# Altium PCB HolderDog_Simetric.PcbDoc
Units mm, origin at the board's own origin, x right, y up, seen from the top; angles counter-clockwise.
Board outline 356.65 x 138 mm, 2 copper layers (Top Layer, Bottom Layer); 20 components, 16 nets, 106 pads, 29 vias.
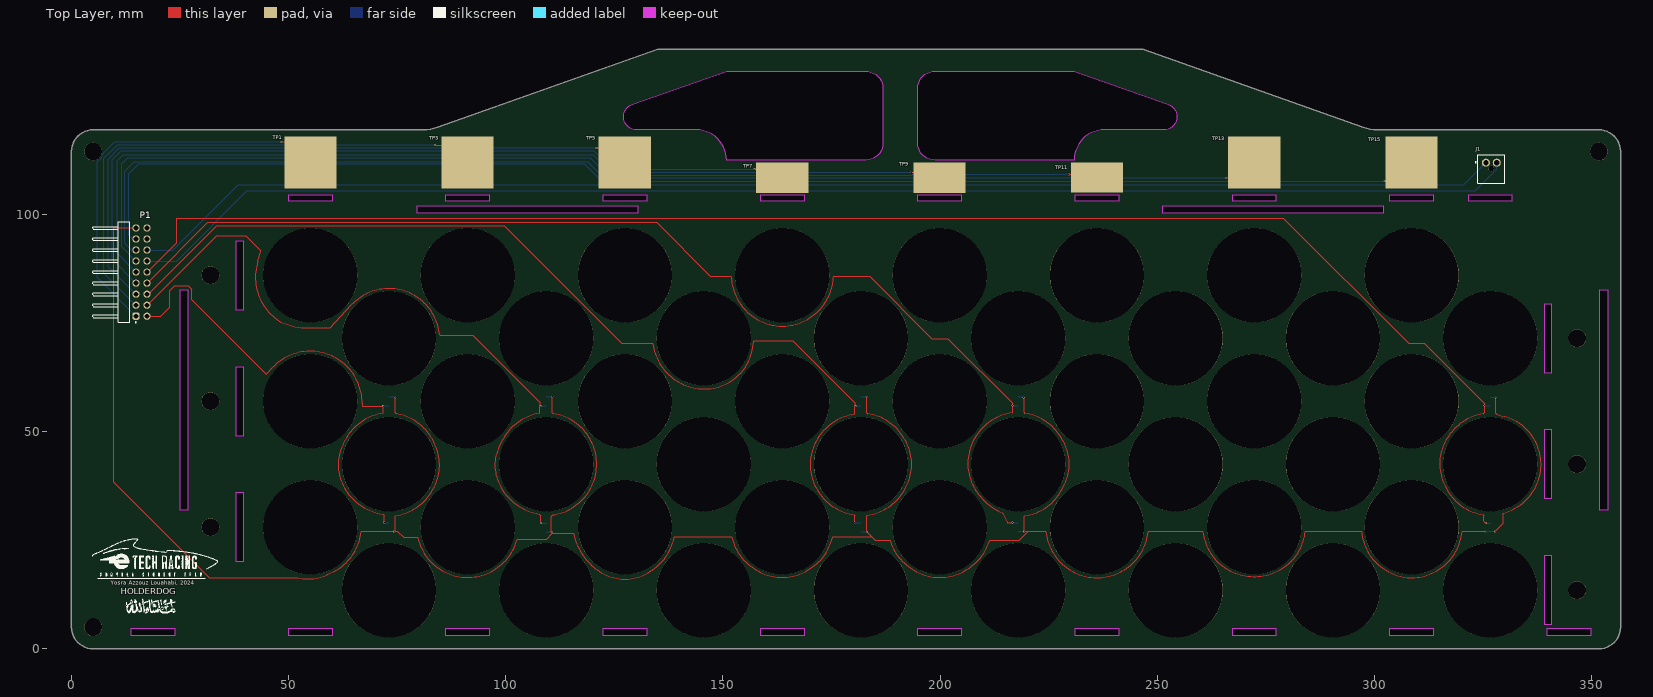
[diagram p0: Top Layer view]
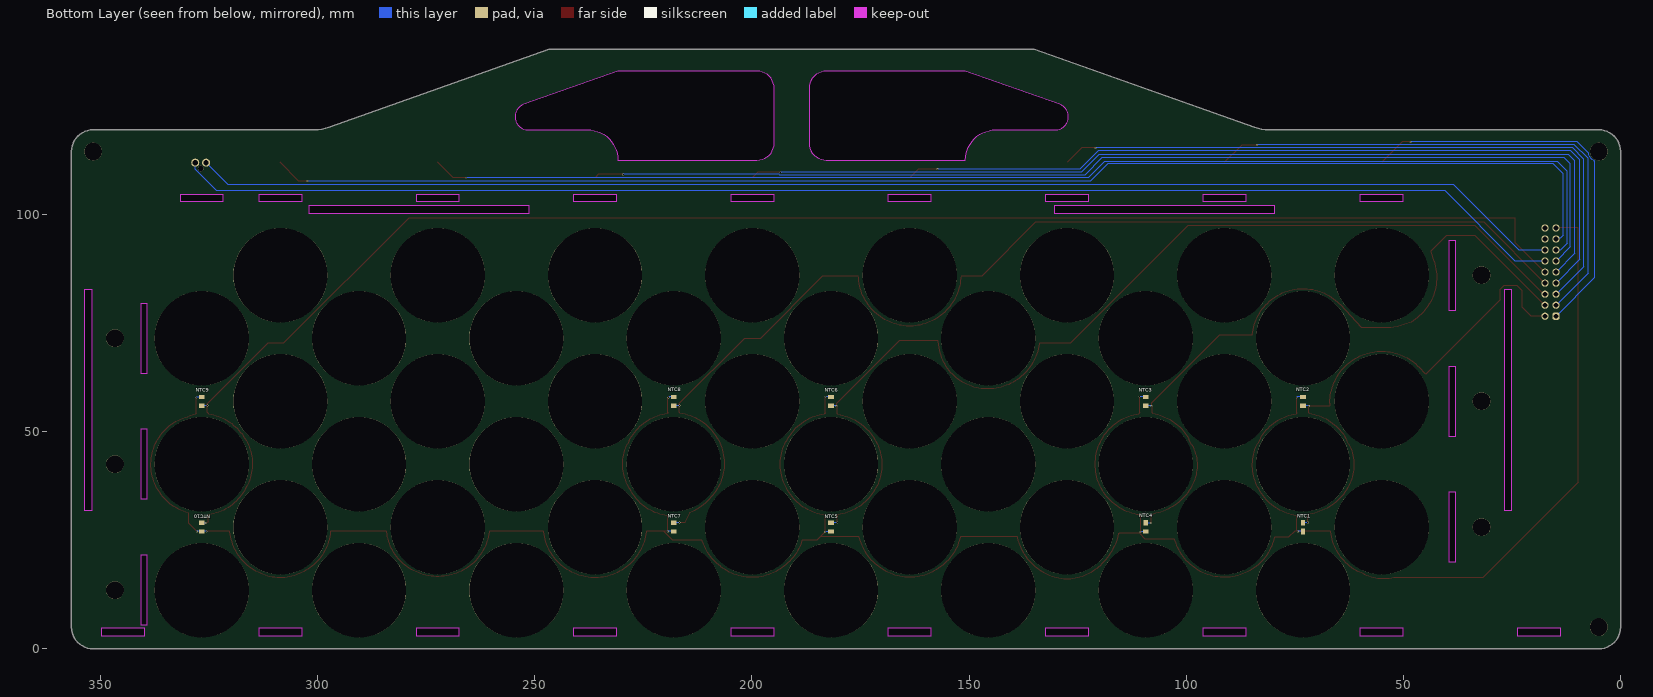
[diagram p1: Bottom Layer view, seen from below]
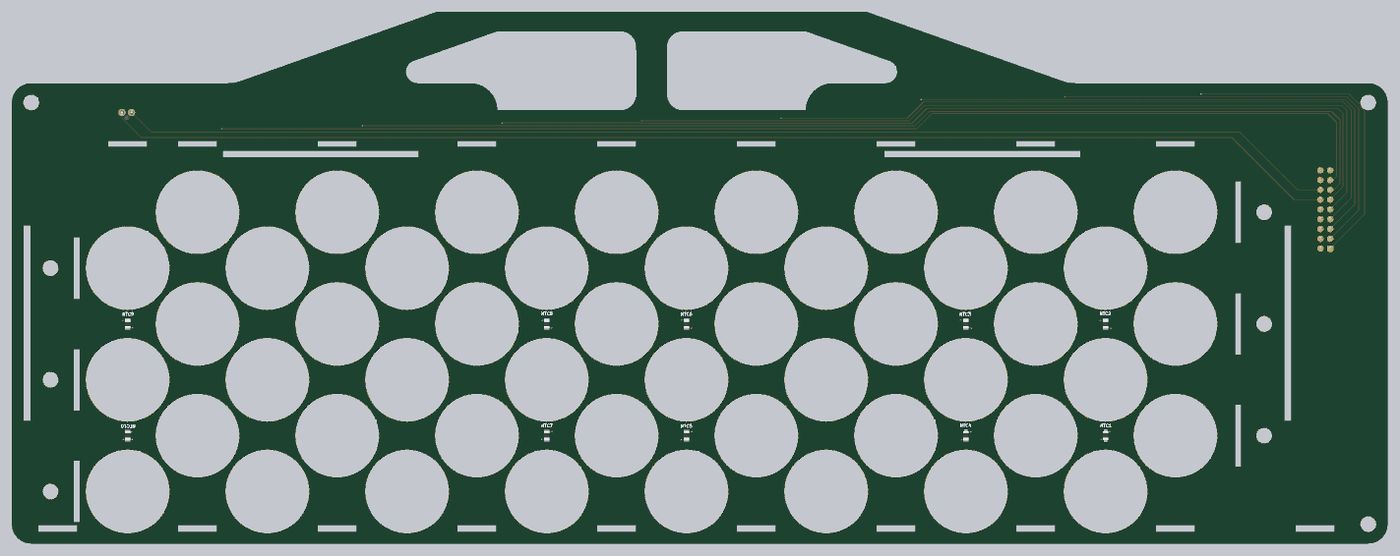
[diagram p2: 3D render of the assembled board from below, using the file's embedded part models]

## Layer stack, top to bottom
Top Solder: solder mask 0.0102, Solder Resist, Dk 3.5
Top Layer: signal copper 0.0356
Dielectric 1: dielectric 0.32, FR-4, Dk 4.8
Bottom Layer: signal copper 0.0356
Bottom Solder: solder mask 0.0102, Solder Resist, Dk 3.5

## Board outline
134.977,138 84.31,120.073 83.497,119.824 82.666,119.644 81.823,119.536 80.974,119.5 5,119.5 4.347,119.457 3.706,119.33 3.087,119.119 2.5,118.83 1.956,118.467 1.464,118.036 1.033,117.544 0.67,117 0.381,116.413 0.17,115.794 0.043,115.153 0,114.5 0,5 0.043,4.347 0.17,3.706 0.381,3.087 0.67,2.5 1.033,1.956 1.464,1.464 1.956,1.033 2.5,0.67 3.087,0.381 3.706,0.17 4.347,0.043 5,0 351.65,0 352.303,0.043 352.945,0.17 353.564,0.381 354.15,0.67 354.694,1.033 355.186,1.464 355.617,1.956 355.981,2.5 356.27,3.087 356.48,3.706 356.608,4.347 356.65,5 356.65,114.5 356.608,115.153 356.48,115.794 356.27,116.413 355.981,117 355.617,117.544 355.186,118.036 354.694,118.467 354.15,118.83 353.564,119.119 352.945,119.33 352.303,119.457 351.65,119.5 300.676,119.5 299.827,119.536 298.984,119.644 298.153,119.824 297.341,120.073 246.673,138
cut-out: 50,4.75 60,4.75 60,3 50,3
cut-out: 303.54,3 303.54,4.75 313.54,4.75 313.54,3
cut-out: 340.65,5.5 339.15,5.5 339.15,21.5 340.65,21.5
cut-out: 39.5,20 38,20 38,36 39.5,36
cut-out: 340.65,34.5 339.15,34.5 339.15,50.5 340.65,50.5
cut-out: 39.5,49 38,49 38,65 39.5,65
cut-out: 339.76,4.75 349.76,4.75 349.76,3 339.76,3
cut-out: 267.32,4.75 277.32,4.75 277.32,3 267.32,3
cut-out: 194.88,4.75 204.88,4.75 204.88,3 194.88,3
cut-out: 122.44,4.75 132.44,4.75 132.44,3 122.44,3
cut-out: 25,31.875 25,82.625 26.75,82.625 26.75,31.875
cut-out: 302.025,102 302.025,100.25 251.275,100.25 251.275,102
cut-out: 79.625,102 130.375,102 130.375,100.25 79.625,100.25
cut-out: 351.9,82.625 353.65,82.625 353.65,31.875 351.9,31.875
cut-out: 50,104.5 60,104.5 60,103 50,103
cut-out: 86.22,104.5 96.22,104.5 96.22,103 86.22,103
cut-out: 122.44,104.5 132.44,104.5 132.44,103 122.44,103
cut-out: 158.66,104.5 168.66,104.5 168.66,103 158.66,103
cut-out: 231.1,104.5 241.1,104.5 241.1,103 231.1,103
cut-out: 267.32,104.5 277.32,104.5 277.32,103 267.32,103
cut-out: 303.54,104.5 313.54,104.5 313.54,103 303.54,103
cut-out: 339.15,79.5 340.65,79.5 340.65,63.5 339.15,63.5
cut-out: 38,94 39.5,94 39.5,78 38,78
cut-out: 241.1,4.75 241.1,3 231.1,3 231.1,4.75
cut-out: 168.66,4.75 168.66,3 158.66,3 158.66,4.75
cut-out: 96.22,4.75 96.22,3 86.22,3 86.22,4.75
cut-out: 23.78,4.75 23.78,3 13.78,3 13.78,4.75
cut-out: 321.65,104.5 331.65,104.5 331.65,103 321.65,103
cut-out: 194.88,104.5 204.88,104.5 204.88,103 194.88,103
cut-out: 186.825,129 186.825,116.5 186.776,115.874 186.629,115.264 186.389,114.684 186.061,114.149 185.654,113.672 185.176,113.264 184.641,112.936 184.061,112.696 183.451,112.549 182.825,112.5 150.825,112.5 150.781,113.284 150.65,114.058 150.432,114.812 150.132,115.537 149.752,116.224 149.298,116.864 148.775,117.45 148.19,117.973 147.549,118.427 146.862,118.807 146.137,119.107 145.383,119.324 144.609,119.456 143.825,119.5 130.143,119.5 129.622,119.546 129.117,119.681 128.643,119.902 128.215,120.202 127.845,120.572 127.545,121 127.324,121.474 127.189,121.979 127.143,122.5 127.19,123.025 127.327,123.533 127.551,124.01 127.855,124.44 128.23,124.81 128.663,125.11 129.143,125.328 150.825,133 182.825,133 183.451,132.951 184.061,132.804 184.641,132.564 185.176,132.236 185.654,131.828 186.061,131.351 186.389,130.816 186.629,130.236 186.776,129.626
cut-out: 230.825,112.5 198.825,112.5 198.199,112.549 197.589,112.696 197.009,112.936 196.474,113.264 195.997,113.672 195.589,114.149 195.261,114.684 195.021,115.264 194.874,115.874 194.825,116.5 194.825,129 194.874,129.626 195.021,130.236 195.261,130.816 195.589,131.351 195.997,131.828 196.474,132.236 197.009,132.564 197.589,132.804 198.199,132.951 198.825,133 230.825,133 252.508,125.328 252.985,125.111 253.417,124.813 253.791,124.445 254.095,124.017 254.32,123.543 254.459,123.038 254.507,122.515 254.464,121.992 254.33,121.485 254.11,121.009 253.811,120.578 253.441,120.206 253.011,119.904 252.536,119.682 252.03,119.546 251.507,119.5 237.825,119.5 237.041,119.456 236.268,119.324 235.513,119.107 234.788,118.807 234.101,118.427 233.461,117.973 232.875,117.45 232.352,116.864 231.898,116.224 231.518,115.537 231.218,114.812 231.001,114.058 230.869,113.284

## Design rules (kind name [scope] priority, off if disabled: settings)
Clearance [All] p1: gap=0.254 ignorepadtopadclearanceinfootprint=FALSE
DiffPairsRouting [All] p1: maxlimit=0.2 minlimit=0.2 mostfreqgap=0.2 toplayer_minwidth=0.2 toplayer_maxwidth=0.2 toplayer_prefwidth=0.2 bottomlayer_minwidth=0.2 bottomlayer_maxwidth=0.2 bottomlayer_prefwidth=0.2 maxuncoupledlength=12.7
PolygonConnect [All] p1: connectstyle=Relief reliefconductorwidth=0.254 reliefentries=4 polygonreliefangle="90 Angle" airgapwidth=0.254
RoutingVias [All] p1: holewidth=0.3 width=0.45 viastyle="Through Hole" minholewidth=0.3 minwidth=0.45 maxholewidth=0.3 maxwidth=0.45
SolderMaskExpansion [All] p1: expansion=0.102 istentingtop=FALSE
SupplyNets "Schematic Supply Nets" [InNet('GND')] p1: voltage=0.000
Width [All] p1: maxlimit=0.2 minlimit=0.2 preferedwidth=0.2
29 further rules are at their usual default settings.

## Components (designator, comment, footprint, x,y, rotation, side; value= is the part's Value field where it differs from the comment)
J1 "J_NanoFit_1x2" FP-105309-1102-MFG 326.898,110.49 r0 top
NTC1 "NTC SMD 0805" RESC2012X10N#1 73.11,28 r270 bottom
NTC2 "NTC SMD 0805" RESC2012X10N#2 73.11,57 r90 bottom
NTC3 "NTC SMD 0805" RESC2012X10N#2 109.33,57 r90 bottom
NTC4 "NTC SMD 0805" RESC2012X10N#3 109.33,28 r270 bottom
NTC5 "NTC SMD 0805" RESC2012X10N#2 181.77,28 r270 bottom
NTC6 "NTC SMD 0805" RESC2012X10N#2 181.77,57 r90 bottom
NTC7 "NTC SMD 0805" RESC2012X10N#2 217.99,28 r270 bottom
NTC8 "NTC SMD 0805" RESC2012X10N#2 217.99,57 r90 bottom
NTC9 "NTC SMD 0805" RESC2012X10N#2 326.65,57 r90 bottom
NTC10 "NTC SMD 0805" RESC2012X10N#2 326.65,28 r270 bottom
P1 "61301821021" 61301821021 12.129,86.741 r270 top
TP1 "Test Point" TESTPOINT_WIDE#1 55,111.999 r0 top
TP3 "Test Point" TESTPOINT_WIDE#1 91.22,111.987 r0 top
TP5 "Test Point" TESTPOINT_WIDE#1 127.381,112.014 r0 top
TP7 "Test Point" TESTPOINT_WIDE#2 163.66,108.489 r0 top
TP9 "Test Point" TESTPOINT_WIDE#2 199.88,108.502 r0 top
TP11 "Test Point" TESTPOINT_WIDE#2 236.1,108.508 r0 top
TP13 "Test Point" TESTPOINT_WIDE#1 272.32,111.988 r0 top
TP15 "Test Point" TESTPOINT_WIDE#1 308.54,111.975 r0 top

## Footprints (in the part's own frame and the unit in brackets; to place one, negate y for a bottom-side part, rotate by r counter-clockwise, add the part's x,y. Pads: shape width x height; smd on the part's side, far side on the other; paste and mask are expansions set on the pad)
61301821021 [mm] "Pin Header, pitch 2.54 mm, THT, Angled, dual row, 18p"
  rrect50% 1.65x1.65 hole 1.1: 1(10.16,2.73)
  round 1.65 hole 1.1: 2(10.16,5.27) 3(7.62,2.73) 4(7.62,5.27) 5(5.08,2.73) 6(5.08,5.27) 7(2.54,2.73) 8(2.54,5.27) 9(0,2.73) 10(0,5.27) 11(-2.54,2.73) 12(-2.54,5.27) 13(-5.08,2.73) 14(-5.08,5.27) 15(-7.62,2.73) 16(-7.62,5.27) 17(-10.16,2.73) 18(-10.16,5.27)
  silkscreen extent -11.58,-7.27 11.71,2.83, body extent -11.43,-7.27 11.43,5.63, height 5.12
FP-105309-1102-MFG [mm]
  round 1.85 hole 1.2 paste-2539.97 mask+0: 1(-1.25,1.43) 2(1.25,1.43)
  round 1.3 hole 1.3 unplated paste-2539.97 mask+0: ""(0,0.09)
  silkscreen extent -3.75,-3.27 3.07,3.27, body extent -3.17,-3.37 3.17,3.37, height 0.25
RESC2012X10N#1 [mm] "Chip Resistor, 2-Leads, Body 2,00x1,25mm, IPC Medium Density"
  rect 1.3x1 smd: 1(-1,0) 2(1,0)
  body extent -1.1,-0.7 1.1,0.7, height 0.95
RESC2012X10N#2 [mm] "Chip Resistor, 2-Leads, Body 2,00x1,25mm, IPC Medium Density"
  rect 1x1.3 smd: 1(-1,0) 2(1,0)
  body extent -1.1,-0.7 1.1,0.7, height 0.95
RESC2012X10N#3 [mm] "Chip Resistor, 2-Leads, Body 2,00x1,25mm, IPC Medium Density"
  rect 1.3x1 smd: 1(-1,0)
  rect 1x1.3 smd: 2(1,0)
  body extent -1.1,-0.7 1.1,0.7, height 0.95
TESTPOINT_WIDE#1 [mm]
  rect 12x12 smd paste-2539.97: 1(0,0)
TESTPOINT_WIDE#2 [mm]
  rect 12x7 smd paste-2539.97: 1(0,0)

## Part data
J1: library part CMP-002-00001-2, "Conn HDR 2 POS 2.5mm Solder ST Thru-Hole 2 Terminal 1 Port Nano-Fit Tray"
NTC1 NTC2 NTC3 NTC4 NTC5 NTC6 NTC7 NTC8 NTC9 NTC10: library part CMP-010-00001-1, "NTC 0805 package 10kR"
P1: library part CMP-002-00004-1, "Board Connector, 18 Contact(s), 2 Row(s), Male, Right Angle, 0.1 inch Pitch, Solder Terminal, Locking, Black Insulator, Plug", Max Operating Temperature=125°C, Min Operating Temperature=-40°C, Connector Type="BOARD CONNECTOR", Mounting Technology=Board, RoHS Compliant=Yes
TP1 TP3 TP5 TP7 TP9 TP11 TP13 TP15: library part TestPoint_Wide, "TestPoint 5x5mm"

## Free pads (board coordinates)
  round 4.1 hole 4.1: 1(5,5) 1(5,114.5) 1(32,28) 1(32,57) 1(32,86) 1(346.65,13.5) 1(346.65,42.5) 1(346.65,71.5) 1(351.65,114.5)
  round 21.7 hole 21.7: 1(55,28) 1(55,57) 1(55,86) 1(73.11,13.5) 1(73.11,42.5) 1(73.11,71.5) 1(91.22,28) 1(91.22,57) 1(91.22,86) 1(109.33,13.5) 1(109.33,42.5) 1(109.33,71.5) 1(127.44,28) 1(127.44,57) 1(127.44,86) 1(145.55,13.5) 1(145.55,42.5) 1(145.55,71.5) 1(163.66,28) 1(163.66,57) 1(163.66,86) 1(181.77,13.5) 1(181.77,42.5) 1(181.77,71.5) 1(199.88,28) 1(199.88,57) 1(199.88,86) 1(217.99,13.5) 1(217.99,42.5) 1(217.99,71.5) 1(236.1,28) 1(236.1,57) 1(236.1,86) 1(254.21,13.5) 1(254.21,42.5) 1(254.21,71.5) 1(272.32,28) 1(272.32,57) 1(272.32,86) 1(290.43,13.5) 1(290.43,42.5) 1(290.43,71.5) 1(308.54,28) 1(308.54,57) 1(308.54,86) 1(326.65,13.5) 1(326.65,42.5) 1(326.65,71.5)

## Via types
v1: diameter 0.45, hole 0.3, Top Layer to Bottom Layer, tented both sides, 29 vias

## Nets (pads, with @x,y where several pads share a name; then routed paths per layer and width w, separated by ;. In a path a pad name is that pad's centre, name@x,y a point inside that pad or via, vN(x,y) a via of type N, cw(c..) or ccw(c..) an arc to the next point about the centre after c; other vN are vias at no path point)
GND: NTC1.2 NTC2.2 NTC3.2 NTC4.2 NTC5.2 NTC6.2 NTC7.2 NTC8.2 NTC9.2 NTC10.2 P1.17 | length 688
  Top Layer w0.2: P1.17 9.896,96.901 9.779,96.784 9.779,38.354 31.75,16.383 52.197,16.383 ccw(c54.595,25.763) 58.921,17.102 59.04,17.153 ccw(c49.778,38.562) 60.419,17.804 ccw(c55.111,28.159) 66.682,26.934 66.8,27.051 v1(74.295,27.051) ; v1(74.549,57.912) 74.549,54.343 74.549,54.288 74.578,54.241 ccw(c74.749,54.343) 74.717,54.146 cw(c72.95,42.777) 82.881,48.586 cw(c72.95,42.777) 82.884,48.582 83.516,47.372 cw(c73.841,42.323) 83.199,36.707 cw(c72.935,42.161) 74.666,30.668 74.549,30.551 74.549,30.495 74.549,27.305 v1(74.295,27.051) ; v1(110.744,58.039) 110.744,54.362 110.744,54.306 110.773,54.258 ccw(c110.944,54.362) 110.913,54.164 cw(c109.134,42.502) 120.932,42.502 cw(c109.134,42.502) 110.861,30.831 110.744,30.713 110.744,30.658 110.49,30.404 v1(110.49,26.924) 110.744,26.67 ; v1(183.007,58.039) 183.007,58.028 183.134,57.901 183.134,54.343 183.134,54.286 183.164,54.238 ccw(c183.334,54.343) 183.303,54.145 cw(c181.585,42.553) 191.9,48.114 192.148,47.656 cw(c182.582,42.477) 192.646,38.349 192.242,37.476 cw(c181.58,42.413) 183.251,30.783 183.134,30.666 183.134,30.609 v1(183.134,26.924) 184.244,25.814 ; v1(219.202,57.912) 219.329,57.785 219.329,54.424 219.329,54.368 219.359,54.319 ccw(c219.529,54.424) 219.498,54.227 cw(c217.788,42.61) 228.25,47.942 228.648,47.155 cw(c219.508,42.532) 228.648,37.908 228.094,36.814 cw(c217.827,42.009) 219.446,30.617 219.329,30.499 219.329,30.442 v1(219.329,27.051) 220.267,27.051 ; 231.525,17.338 cw(c236.036,28.17) 224.367,26.934 224.25,27.051 224.187,27.051 220.267,27.051 ; 231.55,17.327 ccw(c236.127,27.878) 240.89,17.41 240.915,17.421 ccw(c236.221,28.17) 247.885,26.934 248.002,27.051 260.335,27.051 260.398,27.051 260.515,26.934 260.593,26.423 ccw(c271.817,28.131) 267.425,17.662 ccw(c272.289,28.817) 277.292,17.724 277.311,17.733 ccw(c272.778,28.13) 283.992,26.423 284.07,26.934 284.187,27.051 296.831,27.051 296.894,27.051 297.011,26.934 ccw(c308.746,28.177) 304.235,17.273 304.262,17.261 ccw(c308.587,27.234) 313.116,17.352 313.143,17.364 ccw(c308.418,28.177) 320.153,26.934 320.27,27.051 v1(325.501,27.051) ; v1(327.787,27.051) 329.692,28.956 329.692,31.187 329.781,31.276 330.921,31.706 ; v1(327.914,57.912) 327.914,54.205 328.1,54.02 328.137,53.983 329.924,53.488 329.93,53.487 cw(c326.876,42.435) 330.922,31.706 ; v1(74.295,27.051) 75.057,27.051 76.454,25.654 79.564,25.654 79.606,25.654 79.723,25.537 79.952,24.786 ccw(c91.211,28.223) 91.006,16.453 ccw(c91.211,28.245) 102.347,24.36 102.624,25.156 102.742,25.273 109.444,25.273 110.744,26.573 110.744,26.67 ; 110.744,26.67 115.443,26.67 115.576,26.537 ccw(c129.458,29.62) 115.588,26.481 ccw(c129.458,29.62) 119.402,19.566 119.41,19.558 ccw(c128.212,28.374) 121.514,17.87 121.554,17.844 ccw(c127.424,26.536) 133.295,17.845 133.335,17.87 ccw(c126.638,28.374) 138.614,24.944 138.829,25.697 138.946,25.814 151.881,25.814 151.925,25.814 152.042,25.697 152.252,24.975 ccw(c163.237,28.165) 157.558,18.235 ccw(c163.64,27.717) 170.169,18.536 170.238,18.581 ccw(c164.097,28.151) 175.016,24.977 175.225,25.697 175.342,25.814 184.244,25.814 ; 184.244,25.814 184.98,25.078 185.039,25.019 188.317,25.019 188.35,25.019 188.467,24.902 188.778,24.09 ccw(c199.481,28.186) 193.076,18.683 ccw(c199.941,28.026) 207.15,18.946 207.202,18.984 ccw(c200.451,28.17) 211.097,24.092 211.407,24.902 211.524,25.019 218.235,25.019 220.267,27.051
  Bottom Layer w0.2: NTC1.2 73.161,27.051 v1(74.295,27.051) ; NTC2.2 74.393,58 74.481,57.912 v1(74.549,57.912) ; NTC4.2 109.406,26.924 v1(110.49,26.924) ; NTC3.2 109.369,58.039 v1(110.744,58.039) ; NTC5.2 181.846,26.924 v1(183.134,26.924) ; NTC6.2 181.809,58.039 v1(183.007,58.039) ; NTC7.2 218.041,27.051 v1(219.329,27.051) ; NTC8.2 v1@219.046,58 ; v1(325.501,27.051) 326.599,27.051 NTC10.2 326.701,27.051 v1(327.787,27.051) ; NTC9.2 326.738,57.912 v1(327.914,57.912)
NetJ1_1: J1.1 P1.14 | length 316.6
  Bottom Layer w0.2: P1.14 23.368,91.821 38.354,106.807 320.535,106.807 J1.1
NetJ1_2: J1.2 P1.12 | length 321
  Bottom Layer w0.2: P1.12 24.257,89.281 40.386,105.41 323.148,105.41 328.148,110.41 J1.2
NetNTC1_1: NTC1.1 NTC2.1 P1.2 | length 118.2
  Top Layer w0.2: P1.2 20.574,76.581 22.606,78.613 22.606,82.423 23.749,83.566 26.855,83.566 27.686,82.735 27.686,80.391 37.187,70.89 44.845,63.232 46.341,64.807 cw(c54.987,56.596) 66.911,56.597 66.911,56.595 66.911,55.997 67.029,55.88 67.088,55.88 v1(71.755,55.88) 71.755,54.305 71.638,54.188 ccw(c73.264,42.781) 62.993,48.004 62.559,47.15 ccw(c71.966,42.365) 62.556,37.587 ccw(c73.486,43.146) 71.003,31.137 71.764,30.979 72.009,30.734 v1(72.009,29.083)
  Bottom Layer w0.2: v1@71.943,56 NTC2.1 ; v1(72.009,29.083) 73.027,29.083 NTC1.1
NetNTC3_1: NTC3.1 NTC4.1 P1.4 | length 169.3
  Top Layer w0.2: P1.4 33.401,95.123 40.132,95.123 43.629,91.626 43.641,91.614 43.641,91.448 42.916,89.187 ccw(c54.28,85.542) 48.245,75.246 48.567,75.057 48.584,75.051 ccw(c56.956,98.156) 52.925,73.914 59.492,73.914 59.553,73.975 64.47,79.207 cw(c73.164,70.956) 67.975,81.761 68.107,81.823 cw(c73.105,71.228) 84.772,72.29 84.889,72.173 84.955,72.172 92.42,72.172 107.902,56.69 107.902,55.928 v1(107.95,55.88) 107.823,55.753 107.823,54.314 107.706,54.197 ccw(c109.479,42.864) 99.359,48.265 98.679,46.99 ccw(c107.53,42.265) 98.691,37.517 ccw(c109.765,43.418) 107.038,31.17 107.706,31.022 107.823,30.904 107.823,30.852 108.077,30.598 v1(108.077,28.956)
  Bottom Layer w0.2: v1(107.95,55.88) 108.018,55.88 108.138,56 NTC3.1 ; v1(108.077,28.956) 109.286,28.956 NTC4.1
NetNTC5_1: NTC5.1 NTC6.1 P1.6 | length 238.9
  Top Layer w0.2: P1.6 17.653,81.661 33.401,97.409 99.695,97.409 126.746,70.358 133.678,70.358 133.736,70.358 133.853,70.241 133.961,69.653 ccw(c145.748,71.822) 145.438,59.841 ccw(c145.73,71.115) 156.854,69.267 157.106,70.787 157.21,70.891 166.091,70.891 180.467,56.515 v1(180.467,55.88) 180.34,55.753 180.34,54.128 180.223,54.011 179.607,53.886 ccw(c181.967,42.26) 171.472,47.789 171.447,47.743 ccw(c180.866,42.419) 171.448,37.094 ccw(c181.967,42.58) 179.607,30.953 180.223,30.828 180.34,30.711 180.34,30.656 v1(180.34,29.083)
  Bottom Layer w0.2: v1(180.34,29.083) 181.687,29.083 NTC5.1 ; v1(180.467,55.88) 180.535,55.88 180.655,56 NTC6.1
NetNTC7_1: NTC7.1 NTC8.1 P1.8 | length 275
  Top Layer w0.2: P1.8 31.369,98.171 134.724,98.171 147.112,85.784 147.17,85.725 151.719,85.725 151.793,85.725 151.91,85.608 151.935,85.276 ccw(c163.741,86.139) 160.694,74.701 160.721,74.693 ccw(c163.677,85.142) 166.632,74.693 ccw(c163.61,86.139) 175.417,85.276 175.441,85.608 175.558,85.725 183.769,85.725 198.12,71.374 201.803,71.374 216.662,56.515 v1(216.662,56.007) 216.662,54.474 216.662,54.417 216.545,54.3 ccw(c218.174,42.604) 206.452,44.033 ccw(c217.703,42.662) 207.965,36.864 207.969,36.856 ccw(c219.778,43.9) 214.322,31.279 214.37,31.23 214.385,31.201 215.403,29.165 215.485,29.083 v1(216.662,29.083)
  Bottom Layer w0.2: v1(216.662,29.083) 216.73,29.083 216.813,29 NTC7.1 ; v1(216.662,56.007) 217.983,56.007 NTC8.1
NetNTC9_1: NTC9.1 NTC10.1 P1.10 | length 374.5
  Top Layer w0.2: P1.10 24.197,93.539 24.197,99.187 279.019,99.187 307.848,70.358 311.404,70.358 325.374,56.388 325.374,54.457 325.003,54.086 ccw(c326.849,42.436) 316.462,48.025 ccw(c325.959,42.562) 316.305,37.382 316.596,36.841 ccw(c326.82,42.335) 325.003,30.871 325.12,30.754 325.12,30.7 325.12,29.332 325.261,29.19 325.326,29.19 325.56,28.956 v1(325.628,28.956)
  Bottom Layer w0.2: v1(325.374,56.007) 326.643,56.007 NTC9.1 ; v1(325.628,28.956) 326.606,28.956 NTC10.1
NetP1_1: P1.1 TP1.1 | length 92.4
  Top Layer w0.2: v1(48.387,116.713) 50.286,116.713 TP1.1
  Bottom Layer w0.2: P1.1 6.028,85.412 5.969,85.471 5.969,112.256 6.028,112.315 6.051,112.338 ccw(c5,114.5) 7.362,114.052 10.023,116.713 v1(48.387,116.713)
NetP1_3: P1.3 TP3.1 | length 123.6
  Top Layer w0.2: v1(83.693,115.951) 87.255,115.951 TP3.1
  Bottom Layer w0.2: P1.3 7.493,86.487 7.493,112.903 10.668,116.078 83.498,116.078 83.625,115.951 v1(83.693,115.951)
NetP1_5: P1.5 TP5.1 | length 155
  Top Layer w0.2: v1(120.904,115.316) 124.079,115.316 TP5.1
  Bottom Layer w0.2: P1.5 8.509,88.011 8.509,112.776 11.049,115.316 v1(120.904,115.316)
NetP1_7: P1.7 TP7.1 | length 188.4
  Top Layer w0.2: v1(157.226,110.434) 161.715,110.434 TP7.1
  Bottom Layer w0.2: P1.7 9.398,89.662 9.398,112.649 11.43,114.681 120.269,114.681 124.516,110.434 v1(157.226,110.434)
NetP1_9: P1.9 TP9.1 | length 219.5
  Top Layer w0.2: v1(193.421,109.728) 198.654,109.728 TP9.1
  Bottom Layer w0.2: P1.9 10.541,91.059 10.541,112.395 11.89,113.744 120.113,113.744 124.129,109.728 v1(193.421,109.728)
NetP1_11: P1.11 TP11.1 | length 250.8
  Top Layer w0.2: v1(229.616,109.22) 235.387,109.22 TP11.1
  Bottom Layer w0.2: P1.11 11.557,92.583 11.557,111.633 12.943,113.019 119.391,113.019 123.317,109.093 193.605,109.093 193.732,109.22 v1(229.616,109.22)
NetP1_13: P1.13 TP13.1 | length 283.7
  Top Layer w0.2: v1(265.811,108.458) 268.79,108.458 TP13.1
  Bottom Layer w0.2: P1.13 13.843,91.821 12.319,93.345 12.319,109.982 14.478,112.141 118.872,112.141 122.555,108.458 v1(265.811,108.458)
NetP1_15: P1.15 TP15.1 | length 315.8
  Top Layer w0.2: v1(302.26,107.696) 304.261,107.696 TP15.1
  Bottom Layer w0.2: P1.15 14.645,94.575 13.883,94.575 13.208,95.25 13.208,109.347 15.492,111.631 118.112,111.631 122.047,107.696 v1(302.26,107.696)
pads on no net: J1. P1.16 P1.18

## Silkscreen, mask and mechanical layers (free items; w line width, h text height)
Top Overlay:
  drawing of 157 lines, arcs and shapes, not listed
  text "Yosra Azzouz Louahabi, 2024" at 9.022,14.427 h1.6
  text "HOLDERDOG" at 11.303,11.968 h2.5